# Altium PCB phoenix-c1.PcbDoc (part 3 of 3)
Units mm, origin at the board's own origin, x right, y up, seen from the top; angles counter-clockwise.
Board outline 40 x 40 mm, 4 copper layers (Top Layer, Layer 1, Layer 2, Bottom Layer), stack 1.58 mm thick; 71 components, 54 nets, 294 pads, 188 vias.
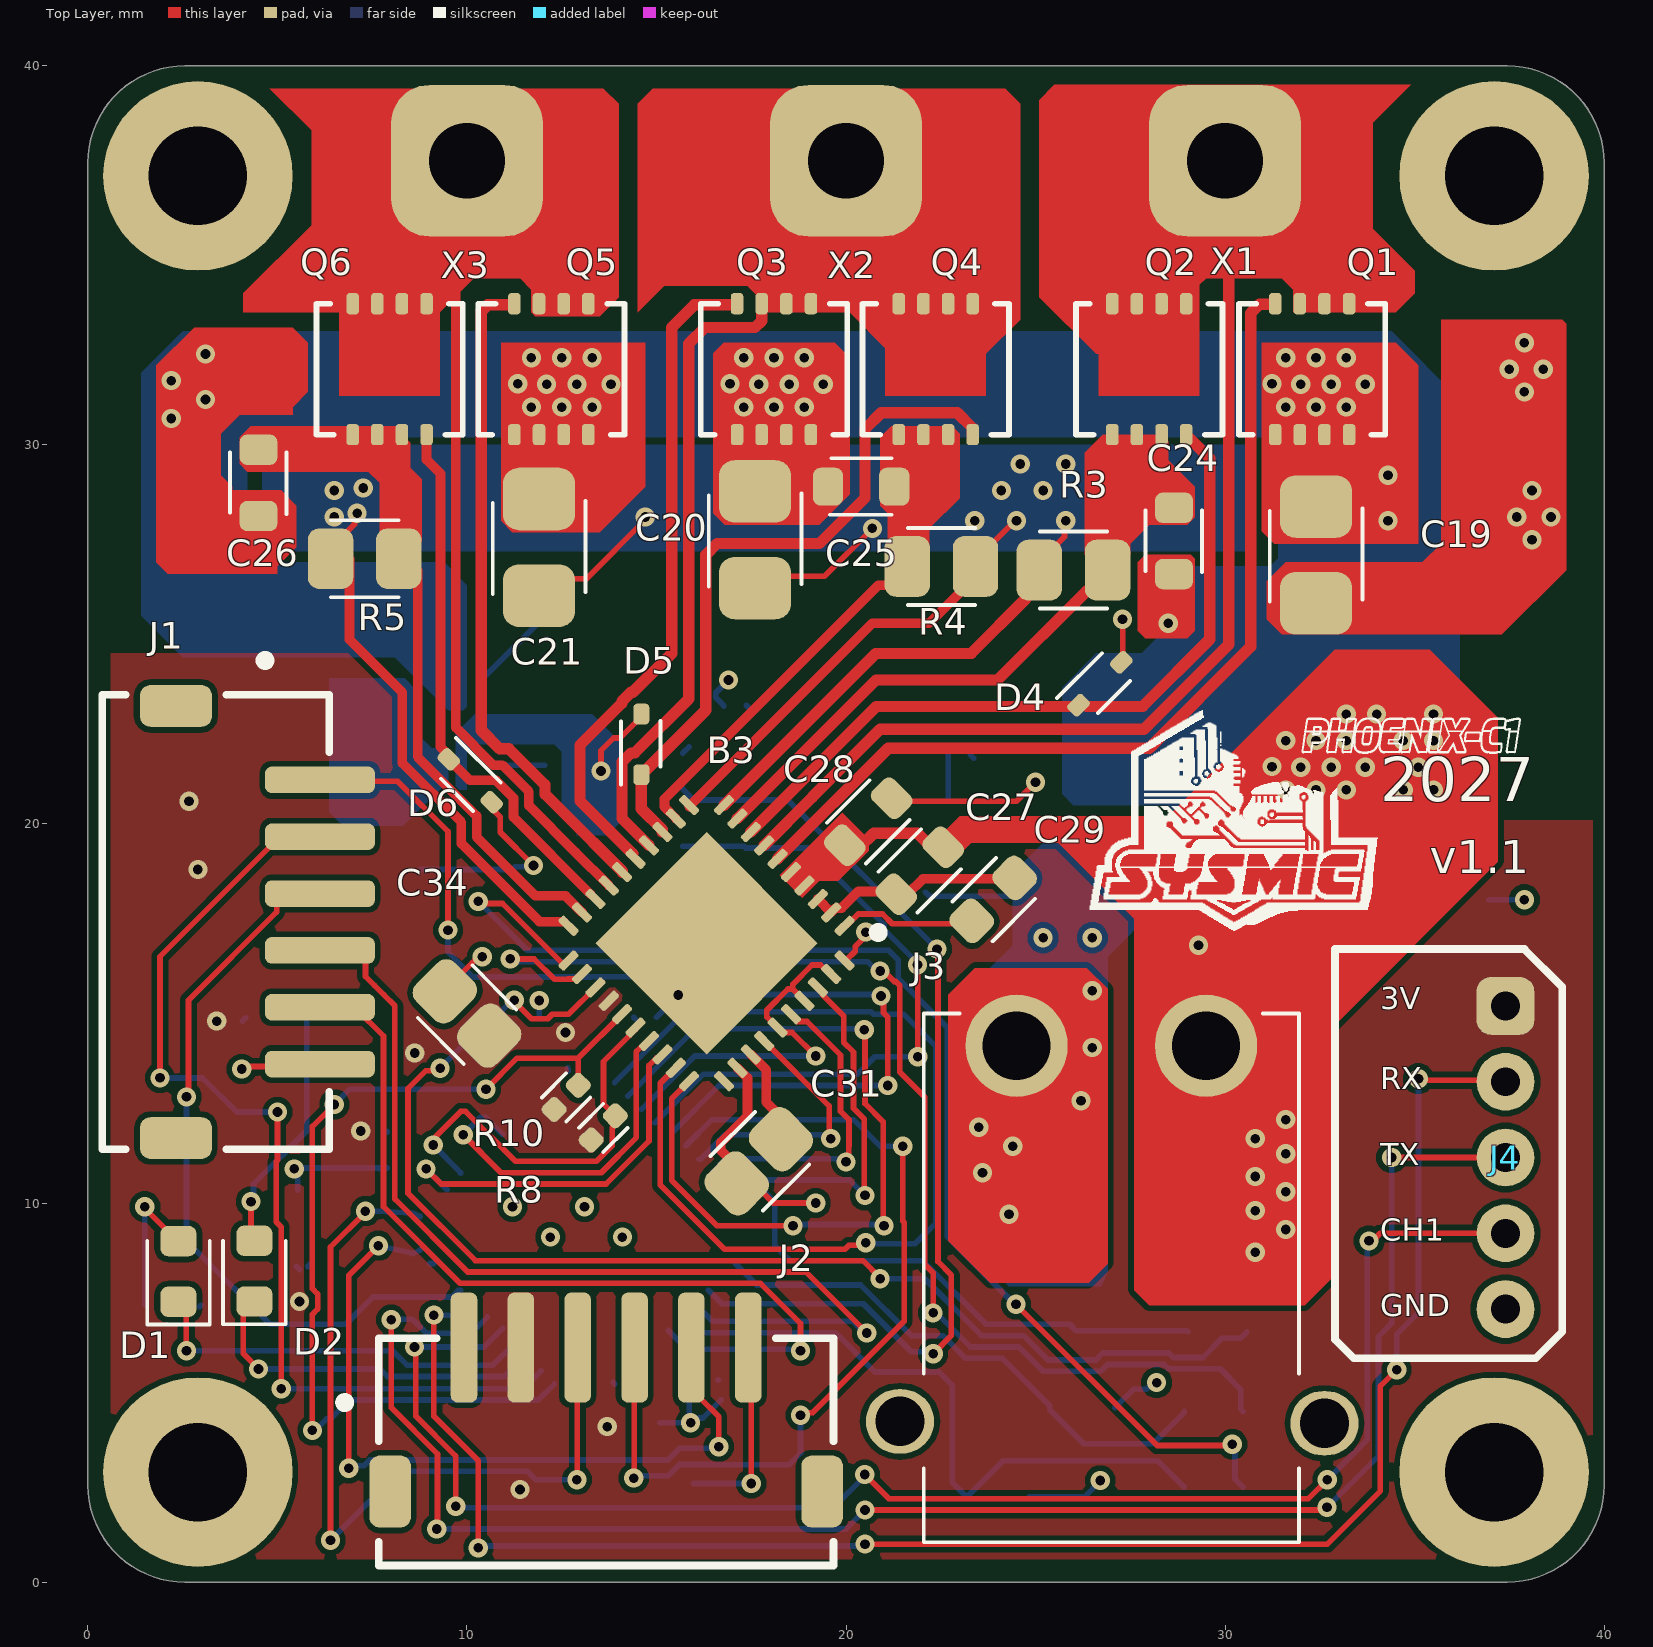
[diagram p0: Top Layer view]

## Polygon pours and split planes (outlines as drawn) (continued)
GND on Layer 2 (split plane): 37.65,39.482 37.848,39.453 38.043,39.404 38.231,39.336 38.413,39.251 38.584,39.148 38.745,39.028 38.894,38.894 39.028,38.745 39.148,38.584 39.251,38.413 39.336,38.231 39.404,38.043 39.453,37.848 39.482,37.65 39.491,37.466 39.49,37.45 39.49,2.55 39.491,2.534 39.482,2.35 39.453,2.152 39.404,1.957 39.336,1.769 39.251,1.587 39.148,1.416 39.028,1.255 38.894,1.106 38.745,0.972 38.584,0.852 38.413,0.749 38.231,0.664 38.043,0.596 37.848,0.547 37.65,0.518 37.466,0.509 37.45,0.51 2.55,0.51 2.534,0.509 2.35,0.518 2.152,0.547 1.957,0.596 1.769,0.664 1.587,0.749 1.416,0.852 1.255,0.972 1.106,1.106 0.972,1.255 0.852,1.416 0.749,1.587 0.664,1.769 0.596,1.957 0.547,2.152 0.518,2.35 0.509,2.534 0.51,2.55 0.51,37.45 0.509,37.466 0.518,37.65 0.547,37.848 0.596,38.043 0.664,38.231 0.749,38.413 0.852,38.584 0.972,38.745 1.106,38.894 1.255,39.028 1.416,39.148 1.587,39.251 1.769,39.336 1.957,39.404 2.152,39.453 2.35,39.482 2.534,39.491 2.55,39.49 37.45,39.49 37.466,39.491
GND on Layer 1 (split plane): 37.65,39.482 37.848,39.453 38.043,39.404 38.231,39.336 38.413,39.251 38.584,39.148 38.745,39.028 38.894,38.894 39.028,38.745 39.148,38.584 39.251,38.413 39.336,38.231 39.404,38.043 39.453,37.848 39.482,37.65 39.491,37.466 39.49,37.45 39.49,2.55 39.491,2.534 39.482,2.35 39.453,2.152 39.404,1.957 39.336,1.769 39.251,1.587 39.148,1.416 39.028,1.255 38.894,1.106 38.745,0.972 38.584,0.852 38.413,0.749 38.231,0.664 38.043,0.596 37.848,0.547 37.65,0.518 37.466,0.509 37.45,0.51 2.55,0.51 2.534,0.509 2.35,0.518 2.152,0.547 1.957,0.596 1.769,0.664 1.587,0.749 1.416,0.852 1.255,0.972 1.106,1.106 0.972,1.255 0.852,1.416 0.749,1.587 0.664,1.769 0.596,1.957 0.547,2.152 0.518,2.35 0.509,2.534 0.51,2.55 0.51,37.45 0.509,37.466 0.518,37.65 0.547,37.848 0.596,38.043 0.664,38.231 0.749,38.413 0.852,38.584 0.972,38.745 1.106,38.894 1.255,39.028 1.416,39.148 1.587,39.251 1.769,39.336 1.957,39.404 2.152,39.453 2.35,39.482 2.534,39.491 2.55,39.49 37.45,39.49 37.466,39.491

## Other copper
Top Layer:
  region net GND: 22.7,15.5 23.4,16.2 26.35,16.2 26.9,15.65 26.9,8.4 26.4,7.9 23.8,7.9 22.7,9
  region net GND: 31.1,26.4 31.6,26.9 35.2,26.9 35.7,27.4 35.7,33.3 38.9,33.3 39,33.2 39,26.7 37.3,25 31.5,25 31.1,25.4
  region net VCC: 3.5,30.3 4,30.8 5.4,30.8 5.4,31 5.8,31.4 5.8,32.7 5.4,33.1 2.8,33.1 1.8,32.1 1.8,26.9 2.1,26.6 5,26.6 5,26.8 5.5,27.3 5.5,28.4 5.1,28.8 3.8,28.8 3.8,28.9 3.5,29.2
  region net VCC: 10.9,28 11.2,27.7 13.5,27.7 14.7,28.9 14.7,32.7 10.903,32.7 10.9,32.697
  region net VCC: 30.975,32.7 30.975,27.725 31.3,27.4 35.1,27.4 35.1,32.1 34.5,32.7
  region net VCC: 27.7,26.9 27.9,27.1 29.1,27.1 29.2,27 29.2,25.1 29,24.9 27.9,24.9 27.7,25.1
  region net VCC: 18.25,18.65 19.9,20.3 20.6,19.6 20.6,19.3 19.8,18.5 19.3,18.5 18.85,18.05
  region net VCC: 16.775,32.697 16.5,32.422 16.5,28.2 16.8,27.9 19.3,27.9 20.1,28.7 20.1,32.3 19.703,32.697
  region net VCC: 28,7.3 32.1,7.3 32.8,8 32.8,14.6 37.2,19 37.2,22.8 35.4,24.6 32.9,24.6 28.5,20.2 23,20.2 22.5,19.7 23,19.2 23.3,19.5 25.6,19.5 27.6,17.5 27.6,7.7
  region net SHC: 14,39 13.6,39.4 4.8,39.4 5.9,38.3 5.9,35.8 4.1,34 4.1,33.5 4.101,33.499 9.283,33.499 10.184,34.4 11.4,34.4 11.7,34.1 11.7,33.5 11.8,33.4 13.5,33.4 14,33.9
  region net SHA: 26.599,32.401 25.1,33.9 25.1,39.1 25.5,39.5 34.9,39.5 33.9,38.5 33.9,35.7 35,34.6 35,34 34.5,33.5 31.8,33.5 31.8,34.1 31.5,34.4 29.5,34.4 29.325,34.225 29.325,33.975 29.325,33.499 28.999,33.499 27.9,32.4 27.899,32.401
  region net SHB: 14.9,39.4 14.5,39 14.5,33.5 15.2,34.2 17.4,34.2 17.775,33.825 17.775,33.501 17.776,33.5 20.1,33.5 21.042,32.558 21.042,32.401 23.692,32.401 24.6,33.309 24.6,39 24.2,39.4
  region net SPC: 8.8,27.436 8.8,29.1 8.5,29.4 8.5,30.056 8.283,30.273 8.3,30.29 8.3,30.5 4.3,30.5 4,30.2 4,29.5 4.2,29.3 7.4,29.3 7.7,29 7.7,27.436
  region net SPA: 27.5,27.1 27.5,27.4 28,27.9 29,27.9 29.2,28.1 29.2,28.9 28.5,29.6 28.5,30.1 28.498,30.1 28.325,30.273 26.773,30.273 26.3,29.8 26.3,27.1
  region net SPB: 20.9,30.2 21.2,30.5 22.8,30.5 23,30.3 23,28.6 22.2,27.8 22.2,27 21.1,27 21.1,27.1 21.1,27.2 21.1,28.2 20.9,28.4
Bottom Layer:
  region net LX: 9.5,22 9.068,22 8.668,22.4 8.667,23.533 8.355,23.845 6.368,23.845 6.368,20.305 6.718,19.955 8.323,19.955 9.5,21.132
  region net GND: 10,20.9 9.8,20.9 9.7,21 9.7,22.4 10.2,22.9 13.3,22.9 14,22.2 14,20 13.7,19.7 12.9,19.7 12.9,19.8 12.5,20.2 12.5,21.9 12.3,22.1 10.2,22.1 10,21.9
  region net GND: 26.9,8.188 26.9,16.5 28.2,17.8 28.2,19.2 27.5,19.9 25.6,19.9 24.4,18.7 24.4,16.8 22.9,15.3 22.9,9.2 24.3,7.8 26.737,7.8
  region net GND: 4.6,30 30.8,30 30.8,27.2 4.6,27.2
  region net VCC: 9.4,26.9 10,26.3 10,23.1 9.9,23 9.5,23 8.1,24.4 2.5,24.4 1.4,25.5 1.4,30.8 2,31.4 3.7,31.4 4.2,30.9 4.2,27.1 4.4,26.9
  region net VCC: 27.6,8.8 28.3,8.1 31.3,8.1 32.4,9.2 32.4,16.9 36.2,20.7 36.2,31.2 34.4,33 2.5,33 1.4,31.9 1.4,30.2 31.4,30.2 31.4,25.9 26,20.5 28.5,20.5 29.3,19.7 29.3,17.9 27.6,16.2
  region net VCC: 35.1,19.6 35.1,17 32.3,14.2 32.3,16.8 33.2,17.7 33.2,19.6
  region net VCC: 26,20.5 25.7,20.8 25.7,23.6 26.6,24.5 27.8,24.5 28.2,24.9 28.2,26.4 28.6,26.8 31.2,26.8 31.6,27.2 32.1,27.2 32.1,25.2 27.4,20.5

## Silkscreen, mask and mechanical layers (free items; w line width, h text height)
Top Overlay:
  drawing of 22 lines, arcs and shapes, not listed
  text "2027" at 34.1,20.218 h2
  text "v1.1" at 35.4,18.406 h1.5
Bottom Overlay:
  text "Sysmic Robotics  / Motor Driver Module /  / Designed by: Rodrigo Sierra" at 37.235,32.2 h1 r90
Mechanical 1:
  the board outline again, w0.254

## Text inside footprints (layer, text, board x,y; h text height)
B2: Bottom 3D Body "1" at 9.45,22.9 h0.2 r90
B4: Bottom 3D Body "1" at 21.55,21.7 h0.4
J4: Top Overlay "RX" at 34.1,12.802 h1; Top Overlay "3V" at 34.1,14.909 h1; Top Overlay "TX" at 34.1,10.802 h1; Top Overlay "CH1" at 34.1,8.809 h1; Top Overlay "GND" at 34.1,6.809 h1